# EAGLE board InputSel (EAGLE 7.3.0)
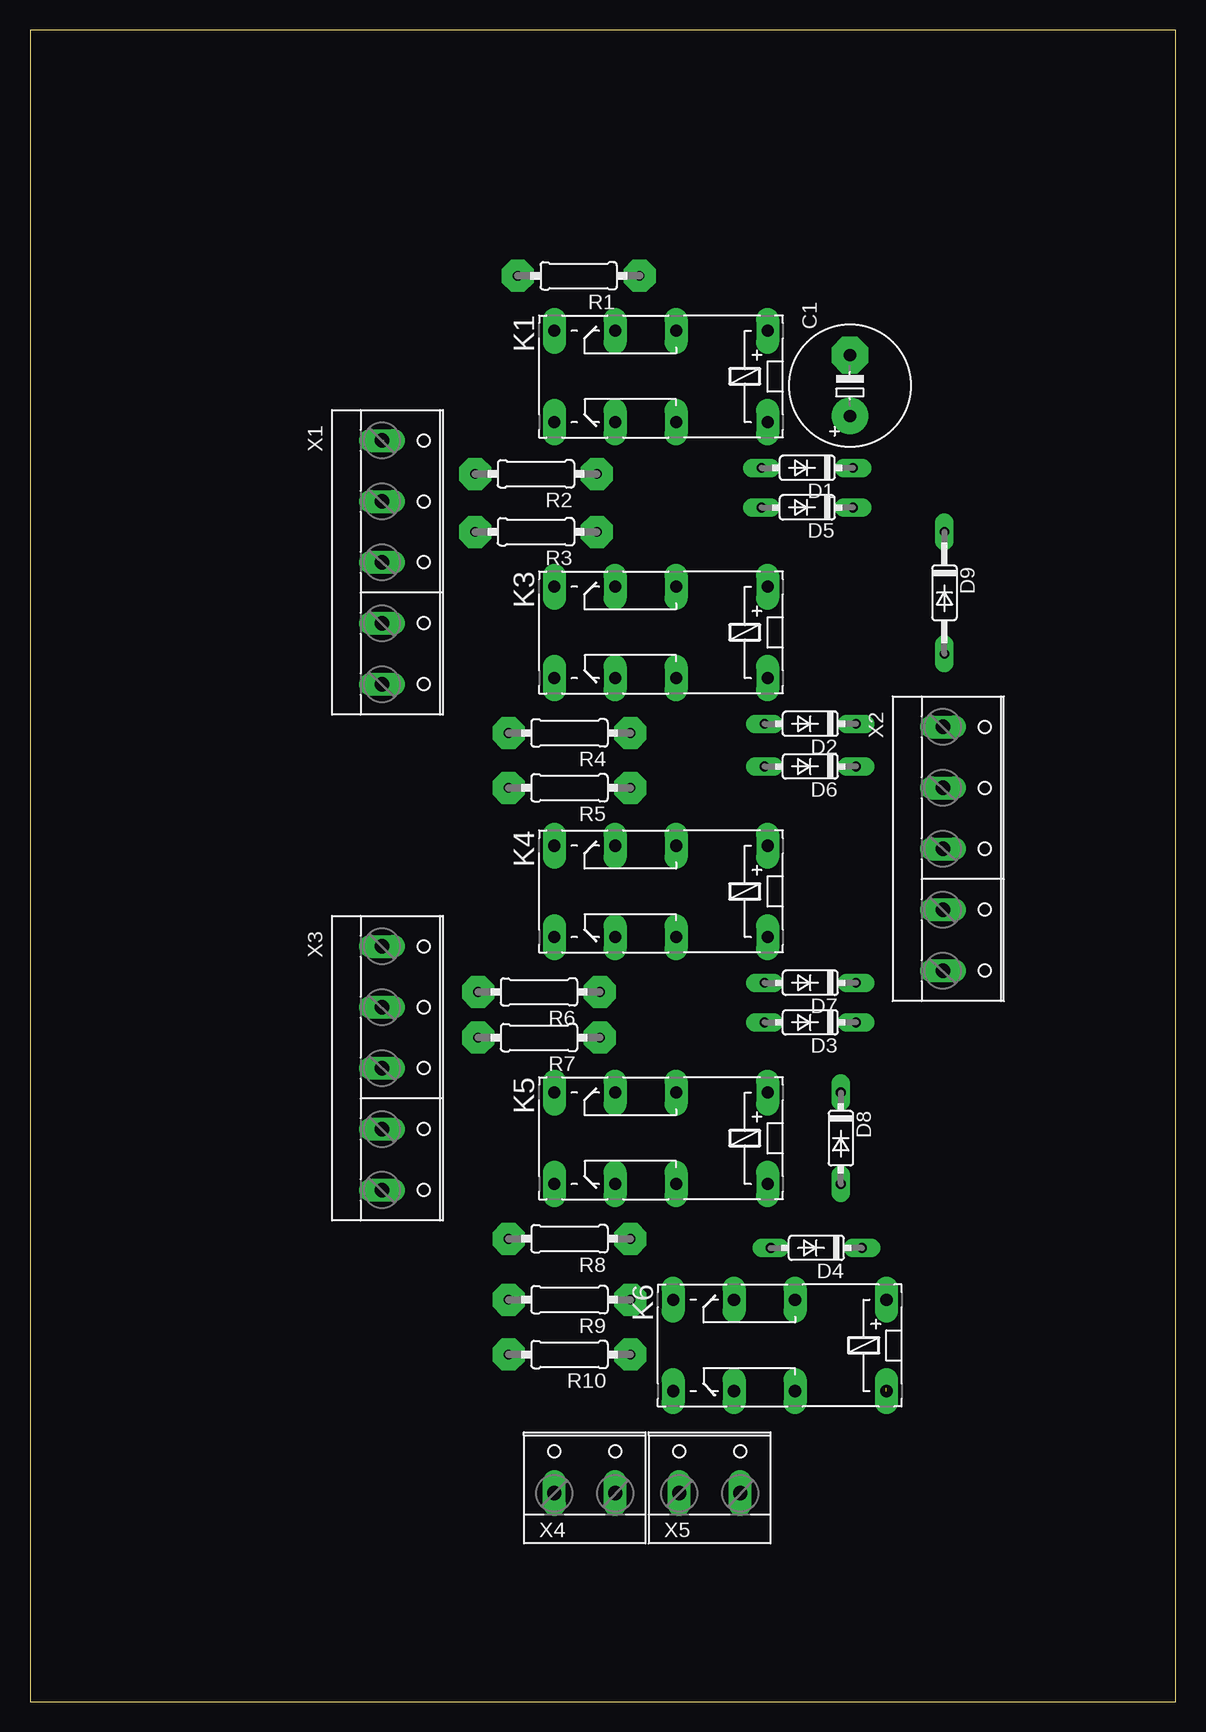
[diagram p0: board, top side]
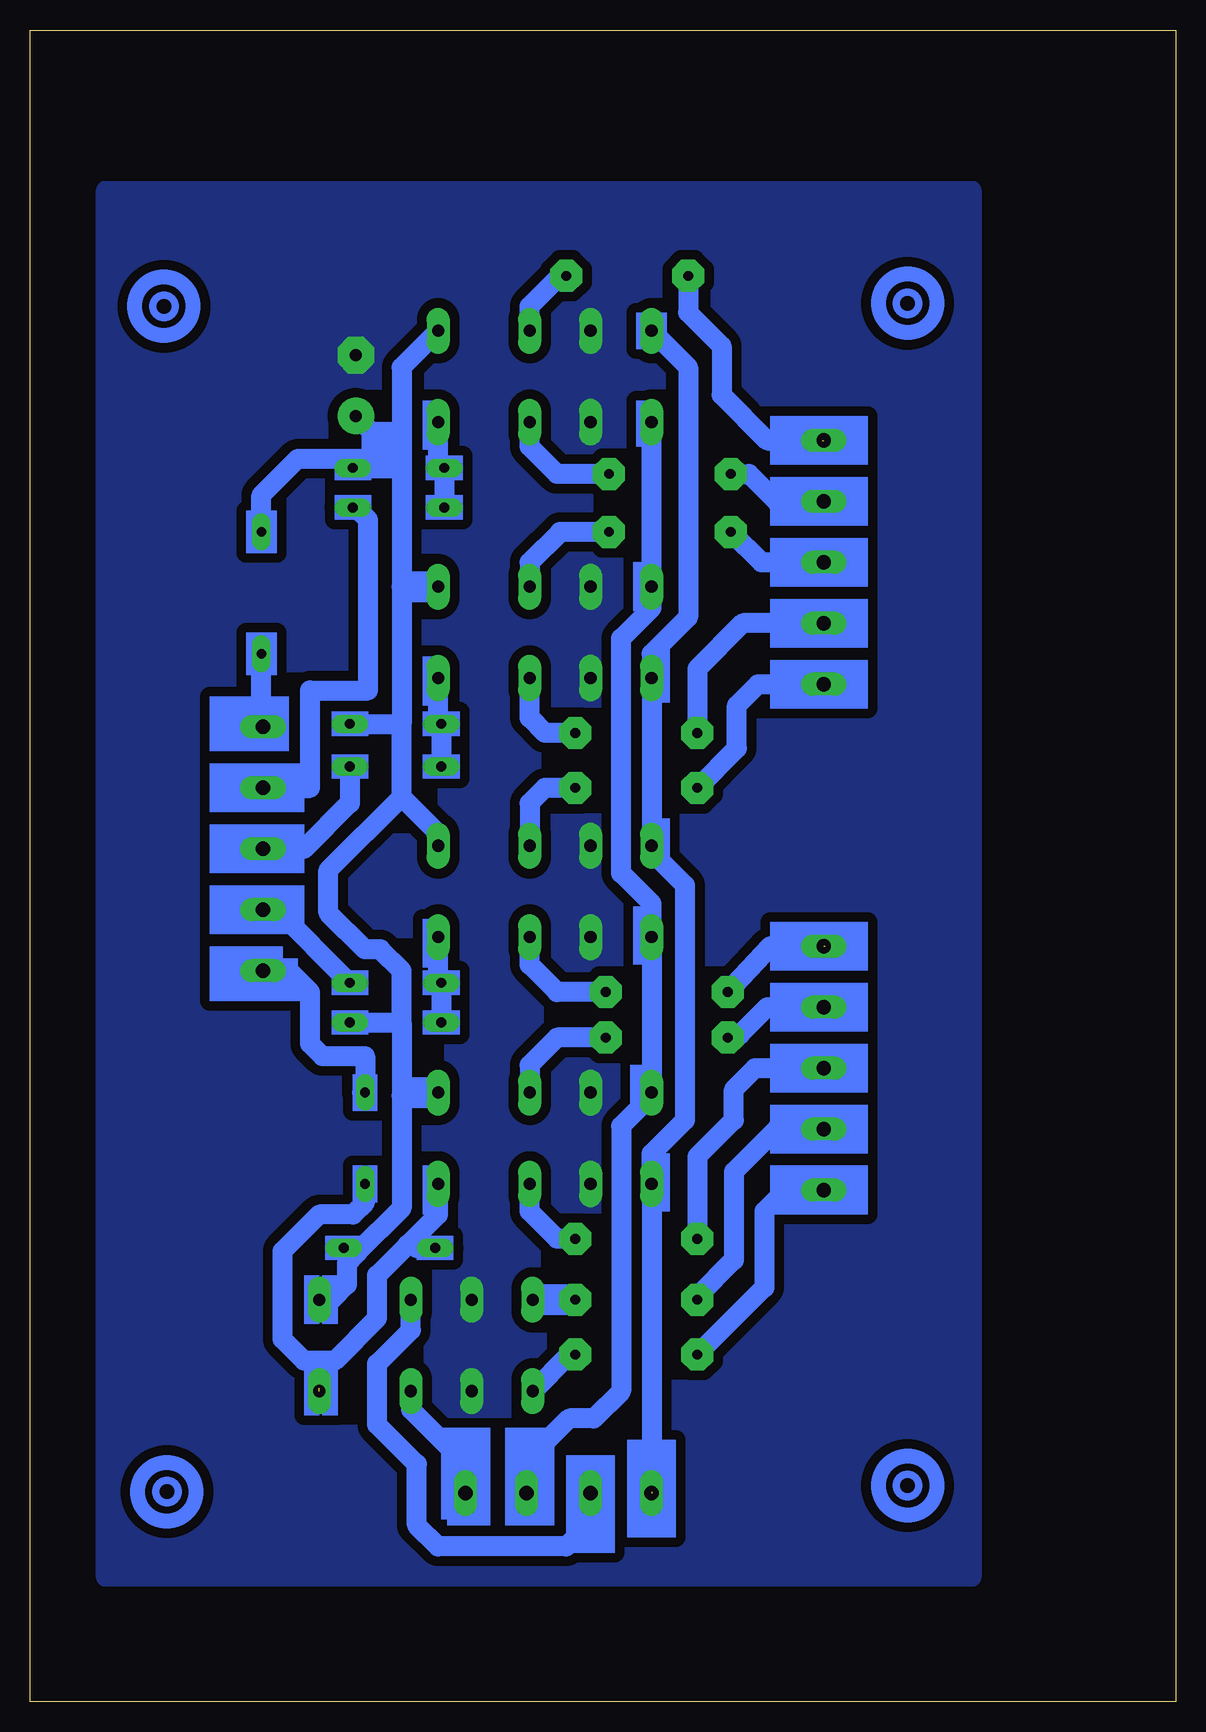
[diagram p1: board, bottom side, seen from below]

Size 95.48 x 139.37 mm. Coordinates in mm from the lower left corner, seen from the top.
Outline: 0,0 95.48,0 95.48,139.37 0,139.37 0,0
Copper layers (1*16): Top 0.035mm / dielectric 1.5mm / Bottom 0.035mm
Design rules "default": minimum track width 10mil, minimum drill 24mil, track to track 8mil, track to pad 8mil, pad to pad 8mil, via to via 8mil, smd to smd 8mil, copper to edge 40mil, drill to drill 8mil, minimum pad ring 14mil, minimum via ring 8mil, stop-mask expansion 4mil, vias tented up to drill 0mil, thermal gap 10mil

## Footprints (pad centres in the part's own frame; a part is rotated, then mirrored left to right if it is on the bottom)
E5-10,5 = drill 1.016 pad 3.048: + -2.54,0 | drill 1.016 pad 3.048 octagon: - 2.54,0
DO35-7 = drill 0.813 long: A 3.81,0; C -3.81,0
DO35-10 = drill 0.813 long: A 5.08,0; C -5.08,0
G6A-234P = drill 1.016 pad 1.93 long: 1 -3.81,-3.81; 16 -3.81,3.81; O1 8.89,-3.81; O2 8.89,3.81; P1 3.81,-3.81; P2 3.81,3.81; S1 13.97,-3.81; S2 13.97,3.81
0207/10 = drill 0.813 pad 2.667 octagon: 1 -5.08,0; 2 5.08,0
W237-5P = drill 1.194 long: 1 -10.16,-0.635; 2 -5.08,-0.635; 3 0,-0.635; 4 5.08,-0.635; 5 10.16,-0.635
W237-132 = drill 1.194 long: 1 -2.54,-0.635; 2 2.54,-0.635

## Placement (x,y rotation side)
C1  470uF  [E5-10,5]  68.33,109.73 90 top
D1  4148  [DO35-7]  64.77,102.87 180 top
D2  4148  [DO35-7]  65.02,81.53 180 top
D3  4148  [DO35-7]  65.02,56.64 180 top
D4  4148  [DO35-7]  65.53,37.85 180 top
D5  4148  [DO35-7]  64.77,99.57 180 top
D6  4148  [DO35-7]  65.02,77.98 180 top
D7  4148  [DO35-7]  65.02,59.94 180 top
D8  4148  [DO35-7]  67.56,46.99 270 top
D9  4004  [DO35-10]  76.2,92.46 270 top
K1  12V  [G6A-234P]  57.66,110.49 180 top
K3  12V  [G6A-234P]  57.66,89.15 180 top
K4  12V  [G6A-234P]  57.66,67.56 180 top
K5  12V  [G6A-234P]  57.66,46.99 180 top
K6  12V  [G6A-234P]  67.56,29.72 180 top
R1  220  [0207/10]  45.72,118.87 180 top
R2  220  [0207/10]  42.16,102.36 180 top
R3  220  [0207/10]  42.16,97.54 180 top
R4  220  [0207/10]  44.96,80.77 180 top
R5  220  [0207/10]  44.96,76.2 180 top
R6  220  [0207/10]  42.42,59.18 180 top
R7  220  [0207/10]  42.42,55.37 180 top
R8  220  [0207/10]  44.96,38.61 180 top
R9  220  [0207/10]  44.96,33.53 180 top
R10  220  [0207/10]  44.96,28.96 180 top
X1  [W237-5P]  29.97,95 270 top
X2  [W237-5P]  76.71,71.12 270 top
X3  [W237-5P]  29.97,52.83 270 top
X4  [W237-132]  46.23,18.03 0 top
X5  [W237-132]  56.64,18.03 0 top

## Library data of the parts
C1 R1-R10 = resistor
D1-D9 = diode
K1 K3-K6 = relay; OC_FARNELL: unknown; OC_NEWARK: unknown
X1-X5 = con-wago-508; OC_FARNELL: unknown; OC_NEWARK: unknown

## Nets
GND: C1.- K1.O1 K1.O2 K3.O1 K3.O2 K4.O1 K4.O2 K5.O1 K5.O2 K6.O1 K6.O2
N$1: K3.P1 R3.1
N$2: R1.2 X1.1
N$3: K3.P2 R4.1
N$4: R2.2 X1.2
N$5: K1.S1 K3.S2 K4.S1 K5.S2 X4.1
N$6: R3.2 X1.3
N$7: R4.2 X1.4
N$8: K1.S2 K3.S1 K4.S2 K5.S1 X5.1
N$9: K1.P2 R2.1
N$10: K1.P1 R1.1
N$11: R5.2 X1.5
N$12: K4.P1 R5.1
N$13: K5.P2 R8.1
N$14: K5.P1 R7.1
N$15: K4.P2 R6.1
N$16: R6.2 X3.1
N$17: R7.2 X3.2
N$18: R8.2 X3.3
N$19: R9.2 X3.4
N$20: K6.S1 R9.1
N$21: R10.2 X3.5
N$22: K6.S2 R10.1
N$23: C1.+ D1.C D2.C D3.C D4.C D9.C K1.1 K3.1 K4.1 K5.1 K6.1
N$24: K6.P1 X4.2
N$25: K6.P2 X5.2
N$26: D4.A D8.A K5.16 K6.16
N$27: D1.A D5.A K1.16
N$28: D2.A D6.A K3.16
N$29: D3.A D7.A K4.16
N$30: D5.C X2.2
N$31: D6.C X2.3
N$32: D8.C X2.5
N$33: D7.C X2.4
N$34: D9.A X2.1

## Tracks (layer width: path | path; a pad name or v marks a point on that pad's centre or on a via)
GND
  pour Bottom (isolate 0.813, no thermals): 17.02,125.98 17.02,10.41 89.15,10.41 89.15,125.98
N$1
  Bottom 1.676: R3.1 51.31,97.54 53.85,95 K3.P1
N$2  (1 unrouted)
  Bottom 1.676: R1.2 40.64,115.82 37.85,113.03 37.85,108.97 34.04,105.16 29.21,105.16 29.21,104.9 29.46,105.16
N$3
  Bottom 1.676: R4.1 52.58,80.77 53.85,82.04 K3.P2
N$4
  Bottom 1.676: R2.2 35.56,102.36 33.27,100.08 X1.2
N$5  (1 unrouted)
  Bottom 1.676: K1.S1 40.64,111.25 40.64,90.42 43.69,87.38 K3.S2 K4.S1 43.69,70.87 40.89,68.07 40.89,48.51 43.69,45.72 K5.S2 43.69,17.53 43.43,17.53
N$6
  Bottom 1.676: R3.2 34.54,95 X1.3 28.7,95
N$7
  Bottom 1.676: X1.4 36.07,89.92 39.88,86.11 R4.2
N$8
  Bottom 1.676: K1.S2 K3.S1 43.69,91.19 46.23,88.65 46.23,69.09 43.69,66.55 K4.S2 K5.S1 43.69,50.55 46.23,48.01 46.23,25.91 48.51,23.62 50.55,23.62 54.1,20.07 X5.1
N$9
  Bottom 1.676: R2.1 51.56,102.36 53.85,104.65 K1.P2 53.85,106.93
N$10
  Bottom 1.676: K1.P1 53.85,116.33 51.31,118.87 R1.1
N$11
  Bottom 1.676: R5.2 36.58,79.5 36.58,83.06 34.8,84.84 X1.5
N$12
  Bottom 1.676: R5.1 52.58,76.2 53.85,74.93 K4.P1
N$13
  Bottom 1.676: R8.1 51.56,38.61 53.85,40.89 K5.P2
N$14
  Bottom 1.676: R7.1 51.56,55.37 53.85,53.09 K5.P1
N$15
  Bottom 1.676: R6.1 51.56,59.18 53.85,61.47 K4.P2
N$16  (1 unrouted)
  Bottom 1.676: R6.2 33.78,62.99 29.21,62.99
N$17
  Bottom 1.676: R7.2 37.34,55.63 36.32,55.63 34.04,57.91 X3.2
N$18
  Bottom 1.676: R8.2 39.88,45.47 36.83,48.51 36.83,51.05 35.05,52.83 X3.3 29.72,52.83
N$19
  Bottom 1.676: X3.4 33.27,47.75 36.83,44.2 36.83,36.83 39.88,33.78 R9.2
N$20
  Bottom 1.676: K6.S1 R9.1
N$21
  Bottom 1.676: X3.5 32.51,42.67 34.29,40.89 34.29,34.54 R10.2
N$22
  Bottom 1.676: K6.S2 50.55,28.96 R10.1
N$23
  Bottom 1.676: K6.1 70.36,33.53 69.09,34.8 69.09,36.58 68.2,37.47 | 64.52,56.64 64.52,50.55 | 64.52,50.55 64.52,41.15 68.2,37.47 | K3.1 64.52,92.96 | 64.52,92.96 64.52,81.53 | 64.52,102.87 64.52,92.96 | 64.52,50.55 64.26,50.8 61.72,50.8 61.47,51.05 K5.1 61.47,50.55 | D4.C 68.96,37.47 68.2,37.47 | 64.52,102.87 D1.C 68.33,103.12 65.02,103.12 64.77,103.38 65.02,103.63 65.28,103.63 | D2.C 64.52,81.53 | K1.1 64.52,111.25 64.52,102.87 | D3.C 64.52,56.64 | 64.52,56.64 64.52,60.96 66.29,62.74 67.56,62.74 70.61,65.79 70.61,69.34 64.52,75.44 | 64.52,75.44 64.52,81.53 | 64.52,75.44 61.47,72.39 K4.1 61.47,71.12 | D9.C 76.2,100.58 73.15,103.63 65.28,103.63 | C1.+ 65.28,104.14 65.28,103.63
N$24
  Bottom 1.676: X4.2 48.77,14.99 50.8,12.95 61.47,12.95 63.25,14.73 63.25,19.81 66.55,23.11 66.55,28.19 63.75,30.99 K6.P1
N$25
  Bottom 1.676: K6.P2 63.75,24.38 59.18,19.81 X5.2
N$26  (1 unrouted)
  Bottom 1.676: 70.87,25.91 K6.16 71.37,28.45 | 64.01,38.1 66.55,35.56 66.55,32 70.1,28.45 71.37,28.45 | 64.01,38.1 61.47,40.64 K5.16 | D4.A 63.25,37.85 63.5,38.1 64.01,38.1 | D8.A 67.56,41.66 68.58,40.64 71.37,40.64 74.42,37.59 74.42,30.23 72.64,28.45 71.37,28.45 | 71.37,26.42 71.37,26.16
N$27
  Bottom 1.676: K1.16 61.47,103.63 D1.A D5.A
N$28
  Bottom 1.676: K3.16 61.47,81.79 D2.A D6.A
N$29
  Bottom 1.676: 61.47,60.45 K4.16 | 61.47,60.2 61.47,60.45 | 61.47,60.45 61.21,60.2 D7.A D3.A
N$30
  Bottom 1.676: X2.2 72.14,76.2 72.14,84.33 67.31,84.33 67.31,98.55 68.33,99.57 D5.C
N$31
  Bottom 1.676: D6.C 68.83,74.93 72.64,71.12 X2.3
N$32
  Bottom 1.676: D8.C 67.82,50.8 67.56,51.05 67.56,53.85 71.12,53.85 72.14,54.86 72.14,59.18 73.91,60.96 X2.5
N$33
  Bottom 1.676: D7.C 74.93,66.04 X2.4 76.2,66.04
N$34
  Bottom 1.676: X2.1 76.2,81.41 D9.A
(copper drawn outside any net)
  shapes: Bottom area x67, Bottom circle x8